# Altium PCB wah.PCBDOC
Units mm, origin at the board's own origin, x right, y up, seen from the top; angles counter-clockwise.
Board outline 50.5 x 50.5 mm, 2 copper layers (Top Layer, Bottom Layer); 25 components, 14 nets, 59 pads, 0 vias.
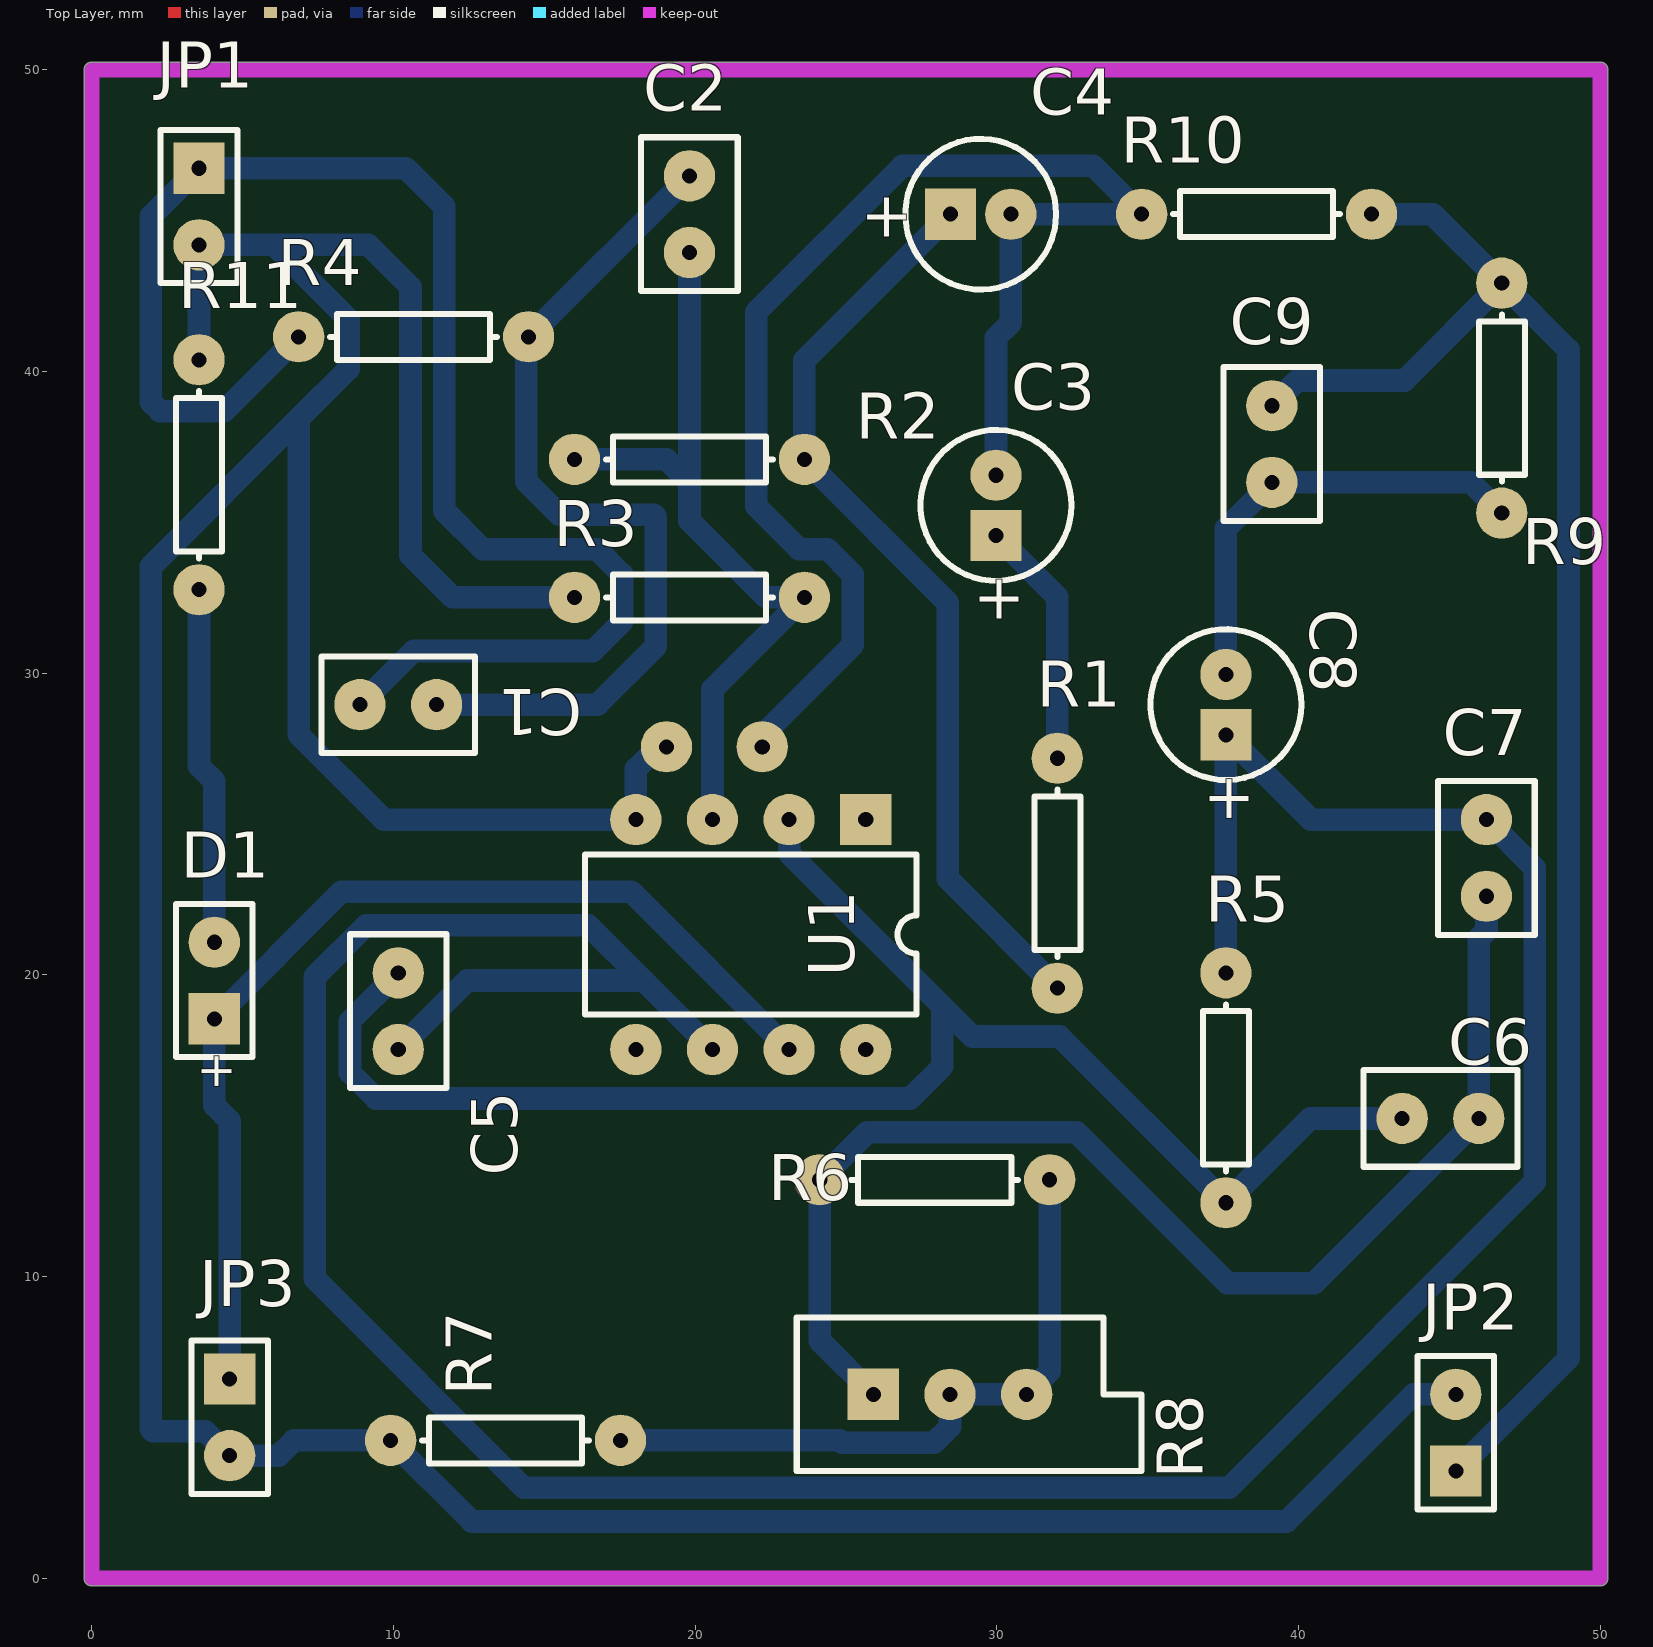
[diagram p0: Top Layer view]
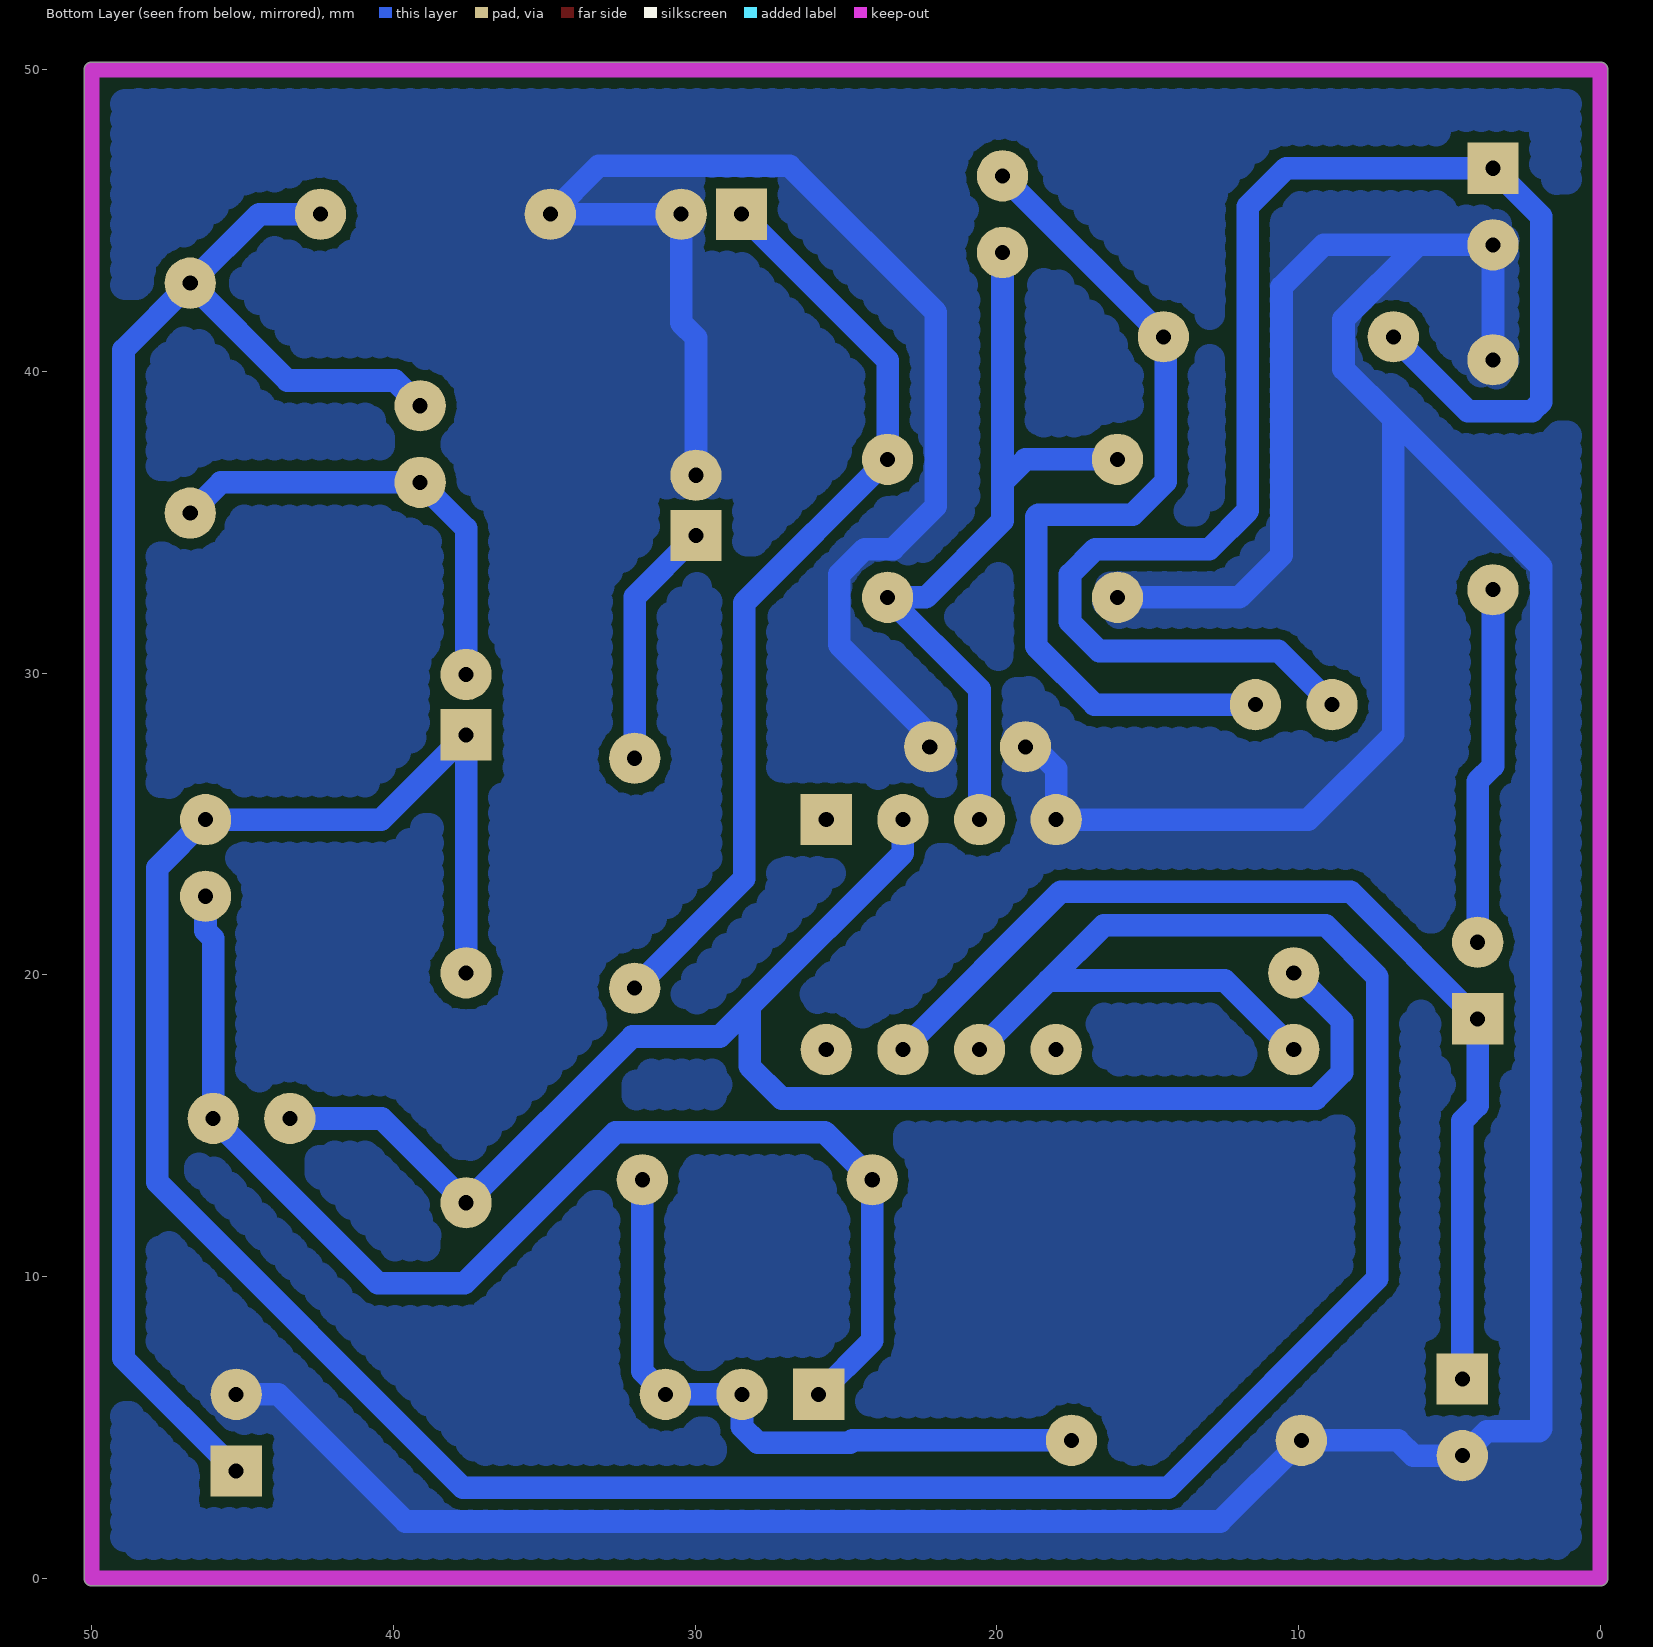
[diagram p1: Bottom Layer view, seen from below]

## Layer stack, top to bottom
Top Layer: signal copper 0.0356
Dielectric: dielectric 0.32, FR-4, Dk 4.8
Bottom Layer: signal copper 0.0356

## Board outline
0,-0.25 cw(c0,0) -0.25,0 -0.25,50 cw(c0,50) 0,50.25 50,50.25 cw(c50,50) 50.25,50 50.25,0 cw(c50,0) 50,-0.25

## Design rules (kind name [scope] priority, off if disabled: settings)
Clearance [All] p1: gap=0.35
ComponentClearance [All] p1: gap=0.254 collisioncheckmode=0
PlaneClearance [All] p1: clearance=1.3
PlaneConnect [All] p1: planeconnectstyle=Direct reliefexpansion=0.508 reliefentries=4 reliefconductorwidth=0.254 reliefairgap=0.254
PolygonConnect [All] p1: connectstyle=Direct reliefconductorwidth=0.254 reliefentries=4 polygonreliefangle="90 Angle"
RoutingLayers [All] p1: top layer="Not Used" bottom layer=Any
RoutingVias [All] p1: holewidth=0.711 width=1.27 viastyle="Through Hole" minholewidth=0.711 minwidth=1.27 maxholewidth=0.711 maxwidth=1.27
SolderMaskExpansion [All] p1: expansion=0.102
TestPointUsage [All] p1: valid=0 allowmultiple=FALSE
Testpoint [All] p1: side=15 testpointundercomponent=TRUE minsize=1.016 maxsize=2.54 preferedsize=1.524 minholesize=0 maxholesize=1.016 preferedholesize=0.813 testpointgrid=0.025 style=1023 order=1234567890
Width [All] p1: maxlimit=1 minlimit=0.254 preferedwidth=0.75
14 further rules are at their usual default settings.

## Components (designator, comment, footprint, x,y, rotation, side; value= is the part's Value field where it differs from the comment)
C1 "Cap" CAPR2.54-5.1X3.2 10.16,28.956 r0 top
C2 "Cap" CAPR2.54-5.1X3.2 19.812,45.212 r270 top
C3 "Cap Pol2" CAPPR2-5X6.8 29.972,35.56 r90 top
C4 "Cap Pol2" CAPPR2-5X6.8 29.464,45.212 r0 top
C5 "Cap" CAPR2.54-5.1X3.2 10.16,18.796 r270 top
C6 "Cap" CAPR2.54-5.1X3.2 44.704,15.24 r0 top
C7 "Cap" CAPR2.54-5.1X3.2 46.228,23.876 r90 top
C8 "Cap Pol2" CAPPR2-5X6.8 37.592,28.956 r90 top
C9 "Cap" CAPR2.54-5.1X3.2 39.116,37.592 r90 top
D1 "LED0" BAT-2 4.064,19.812 r90 top
JP1 "Header 2H" HDR1X2 3.556,46.736 r270 top
JP2 "Header 2H" HDR1X2 45.212,3.556 r90 top
JP3 "Header 2H" HDR1X2 4.572,6.604 r270 top
R1 "Res1" AXIAL-0.3 32.004,23.368 r90 top
R2 "Res1" AXIAL-0.3 19.812,37.084 r0 top
R3 "Res1" AXIAL-0.3 19.812,32.512 r0 top
R4 "Res1" AXIAL-0.3 10.668,41.148 r0 top
R5 "Res1" AXIAL-0.3 37.592,16.256 r90 top
R6 "Res1" AXIAL-0.3 27.94,13.208 r180 top
R7 "Res1" AXIAL-0.3 13.716,4.572 r0 top
R8 "RPot" VR5 28.448,6.096 r0 top
R9 "Res1" AXIAL-0.3 46.736,39.116 r270 top
R10 "Res1" AXIAL-0.3 38.608,45.212 r0 top
R11 "Res1" AXIAL-0.3 3.556,36.576 r270 top
U1 "TL071ACN" DIP8 21.844,21.336 r180 top

## Footprints (in the part's own frame and the unit in brackets; to place one, negate y for a bottom-side part, rotate by r counter-clockwise, add the part's x,y. Pads: shape width x height; smd on the part's side, far side on the other; paste and mask are expansions set on the pad)
AXIAL-0.3 [mm]
  round 1.7 hole 0.5: 1(-3.81,0) 2(3.81,0)
  silkscreen extent -2.77,-0.76 2.77,0.76
BAT-2 [mm]
  rect 1.7x1.7 hole 0.5: 1(-1.27,0)
  round 1.7 hole 0.5: 2(1.27,0)
  silkscreen extent -2.54,-1.27 2.54,1.27
CAPPR2-5X6.8 [mm]
  rect 1.7x1.7 hole 0.5: 1(-1,0)
  round 1.7 hole 0.5: 2(1,0)
  silkscreen extent -2.5,-2.5 2.5,2.5
CAPR2.54-5.1X3.2 [mm]
  round 1.7 hole 0.5: 1(-1.27,0) 2(1.27,0)
  silkscreen extent -2.55,-1.6 2.55,1.6
DIP8 [mm] "DIP; 8 Leads; Row Spacing 7.62 mm; Pitch 2.54 mm"
  rect 1.7x1.7 hole 0.5: 1(-3.81,-3.81)
  round 1.7 hole 0.5: 2(-1.27,-3.81) 3(1.27,-3.81) 4(3.81,-3.81) 5(3.81,3.81) 6(1.27,3.81) 7(-1.27,3.81) 8(-3.81,3.81)
  silkscreen extent -5.5,-2.65 5.5,2.65
HDR1X2 [mm] "Connector; Header; 2 Position"
  rect 1.7x1.7 hole 0.5: 1(0,0)
  round 1.7 hole 0.5: 2(2.54,0)
  silkscreen extent -1.27,-1.27 3.81,1.27
VR5 [mm]
  rect 1.7x1.7 hole 0.5: 1(-2.54,0)
  round 1.7 hole 0.5: 2(0,0) 3(2.54,0)
  silkscreen extent -5.08,-2.54 6.35,2.54

## Part data
C1 C2 C5 C6 C7 C9: "Capacitor"
C3 C4 C8: "Polarized Capacitor (Axial)"
D1: "Typical INFRARED GaAs LED"
JP1 JP2 JP3: "Header, 2-Pin, Right Angle"
R1 R2 R3 R4 R5 R6 R7 R9 R10 R11: "Resistor"
R8: "Potentiometer"
U1: "Low-Noise J-FET Single Operational Amplifier"

## Free pads (board coordinates)
  round 1.7 hole 0.5: 3(22.225,27.559) 4(19.05,27.559)

## Nets (pads, with @x,y where several pads share a name; then routed paths per layer and width w, separated by ;. In a path a pad name is that pad's centre, name@x,y a point inside that pad or via, vN(x,y) a via of type N, cw(c..) or ccw(c..) an arc to the next point about the centre after c; other vN are vias at no path point)
GND: C3.2 C4.2 JP1.2 JP2.2 JP3.2 pad.3 pad.4 R3.1 R7.1 R10.1 R11.1 U1.4 | length 187.8
  Bottom Layer w0.75: R11.1 JP1.2 6.045,44.196 ; R3.1 11.963,32.512 10.566,33.909 10.566,42.799 9.169,44.196 6.045,44.196 ; pad.4@18.669,27.457 18.034,26.822 U1.4 9.677,25.146 6.858,27.965 6.858,38.43 ; pad.3@21.742,27.457 25.222,30.937 25.222,33.274 24.384,34.112 23.444,34.112 22.022,35.534 22.022,41.961 26.873,46.812 33.198,46.812 R10.1 C4.2 30.464,41.615 29.972,41.123 C3.2 ; JP2.2 43.815,6.096 39.599,1.88 12.598,1.88 R7.1 6.706,4.572 6.198,4.064 JP3.2 3.759,4.877 2.032,4.877 1.956,4.953 1.956,33.528 6.858,38.43 ; 6.045,44.196 8.509,41.732 8.509,40.081 6.858,38.43
NetC1_1: C1.1 JP1.1 R4.1 | length 51.4
  Bottom Layer w0.75: R4.1 4.394,38.684 2.261,38.684 1.956,38.989 1.956,45.136 JP1.1 10.414,46.736 11.684,45.466 11.684,35.382 12.954,34.112 16.739,34.112 17.577,33.274 17.577,31.699 16.612,30.734 10.668,30.734 C1.1
NetC1_2: C1.2 C2.1 R4.2 | length 29.5
  Bottom Layer w0.75: C1.2 16.764,28.956 18.694,30.886 18.694,35.187 18.626,35.255 15.494,35.255 14.402,36.347 14.402,41.072 R4.2 C2.1
NetC2_2: C2.2 R2.1 R3.2 U1.3 | length 26.5
  Bottom Layer w0.75: R2.1 19.05,37.084 19.812,36.322 ; C2.2 19.812,36.322 ; U1.3 20.574,29.464 R3.2 22.352,32.512 19.812,35.052 19.812,36.322
NetC3_1: C3.1 R1.2 | length 8.2
  Bottom Layer w0.75: C3.1 32.004,32.528 R1.2
NetC4_1: C4.1 R1.1 R2.2 | length 31.1
  Bottom Layer w0.75: C4.1 23.622,40.37 R2.2 28.372,32.334 28.372,23.19 R1.1
NetC5_1: C5.1 C6.1 R5.1 U1.2 | length 53.8
  Bottom Layer w0.75: C5.1 8.56,18.466 8.56,16.764 9.423,15.9 27.127,15.9 28.194,16.967 28.194,18.948 ; U1.2 23.114,24.028 28.194,18.948 ; C6.1 40.386,15.24 R5.1 32.08,17.958 29.185,17.958 28.194,18.948
NetC5_2: C5.2 C7.2 C8.1 R5.2 U1.6 | length 112.5
  Bottom Layer w0.75: C5.2 12.446,19.812 18.288,19.812 ; U1.6 18.288,19.812 ; R5.2 C8.1 40.402,25.146 C7.2 47.828,23.546 47.828,13.132 37.693,2.997 14.326,2.997 7.391,9.931 7.391,19.939 9.093,21.641 16.459,21.641 18.288,19.812
NetC6_2: C6.2 C7.1 R6.2 R8.1 | length 42.2
  Bottom Layer w0.75: R8.1 24.13,7.874 R6.2 25.705,14.783 32.639,14.783 37.643,9.779 40.513,9.779 C6.2 45.974,21.209 46.228,21.463 C7.1
NetC8_2: C8.2 C9.1 R9.2 | length 15
  Bottom Layer w0.75: C8.2 37.592,34.798 C9.1 45.72,36.322 R9.2
NetC9_2: C9.2 JP2.1 R9.1 R10.2 | length 56.4
  Bottom Layer w0.75: C9.2 39.954,39.7 43.51,39.7 R9.1 ; R10.2 44.45,45.212 R9.1 ; JP2.1 48.946,7.29 48.946,40.716 R9.1
NetD1_2: D1.2 R11.2 | length 11.9
  Bottom Layer w0.75: R11.2 3.556,26.924 4.064,26.416 D1.2
NetR6_1: R6.1 R7.2 R8.2 R8.3 | length 22.2
  Bottom Layer w0.75: R7.2 24.79,4.572 24.867,4.496 27.927,4.496 28.448,5.016 R8.2 R8.3 31.75,6.858 R6.1
VCC: D1.1 JP3.1 U1.7 | length 35.1
  Bottom Layer w0.75: JP3.1 4.572,15.164 4.064,15.672 D1.1 8.28,22.758 17.882,22.758 U1.7
pads on no net: U1.1 U1.5 U1.8

## Polygon pours and split planes (outlines as drawn)
GND on Bottom Layer (hatched 90Degree grid 0.5 track 1): 0,0.254 0,49.657 50.419,49.657 50.419,0

## Keep-outs
Keep-Out Layer:
  lines w0.5: 0,0 0,50 50,50 50,0 0,0

## Text inside footprints (layer, text, board x,y; h text height)
C3: Top Overlay "+" at 30.722,31.585 h1.5 r90
C4: Top Overlay "+" at 25.489,44.462 h1.5
C8: Top Overlay "+" at 38.342,24.981 h1.5 r90
D1: Top Overlay "+" at 4.641,16.142 h1.15 r90